# Altium PCB Tray2.PcbDoc (part 4 of 6)
Units mil, origin at the board's own origin, x right, y up, seen from the top; angles counter-clockwise.
Board outline 6000 x 4000 mil, 2 copper layers (Top Layer, Bottom Layer); 418 components, 415 nets, 1799 pads, 870 vias.
Unrouted connection lines stored in the file: 363.
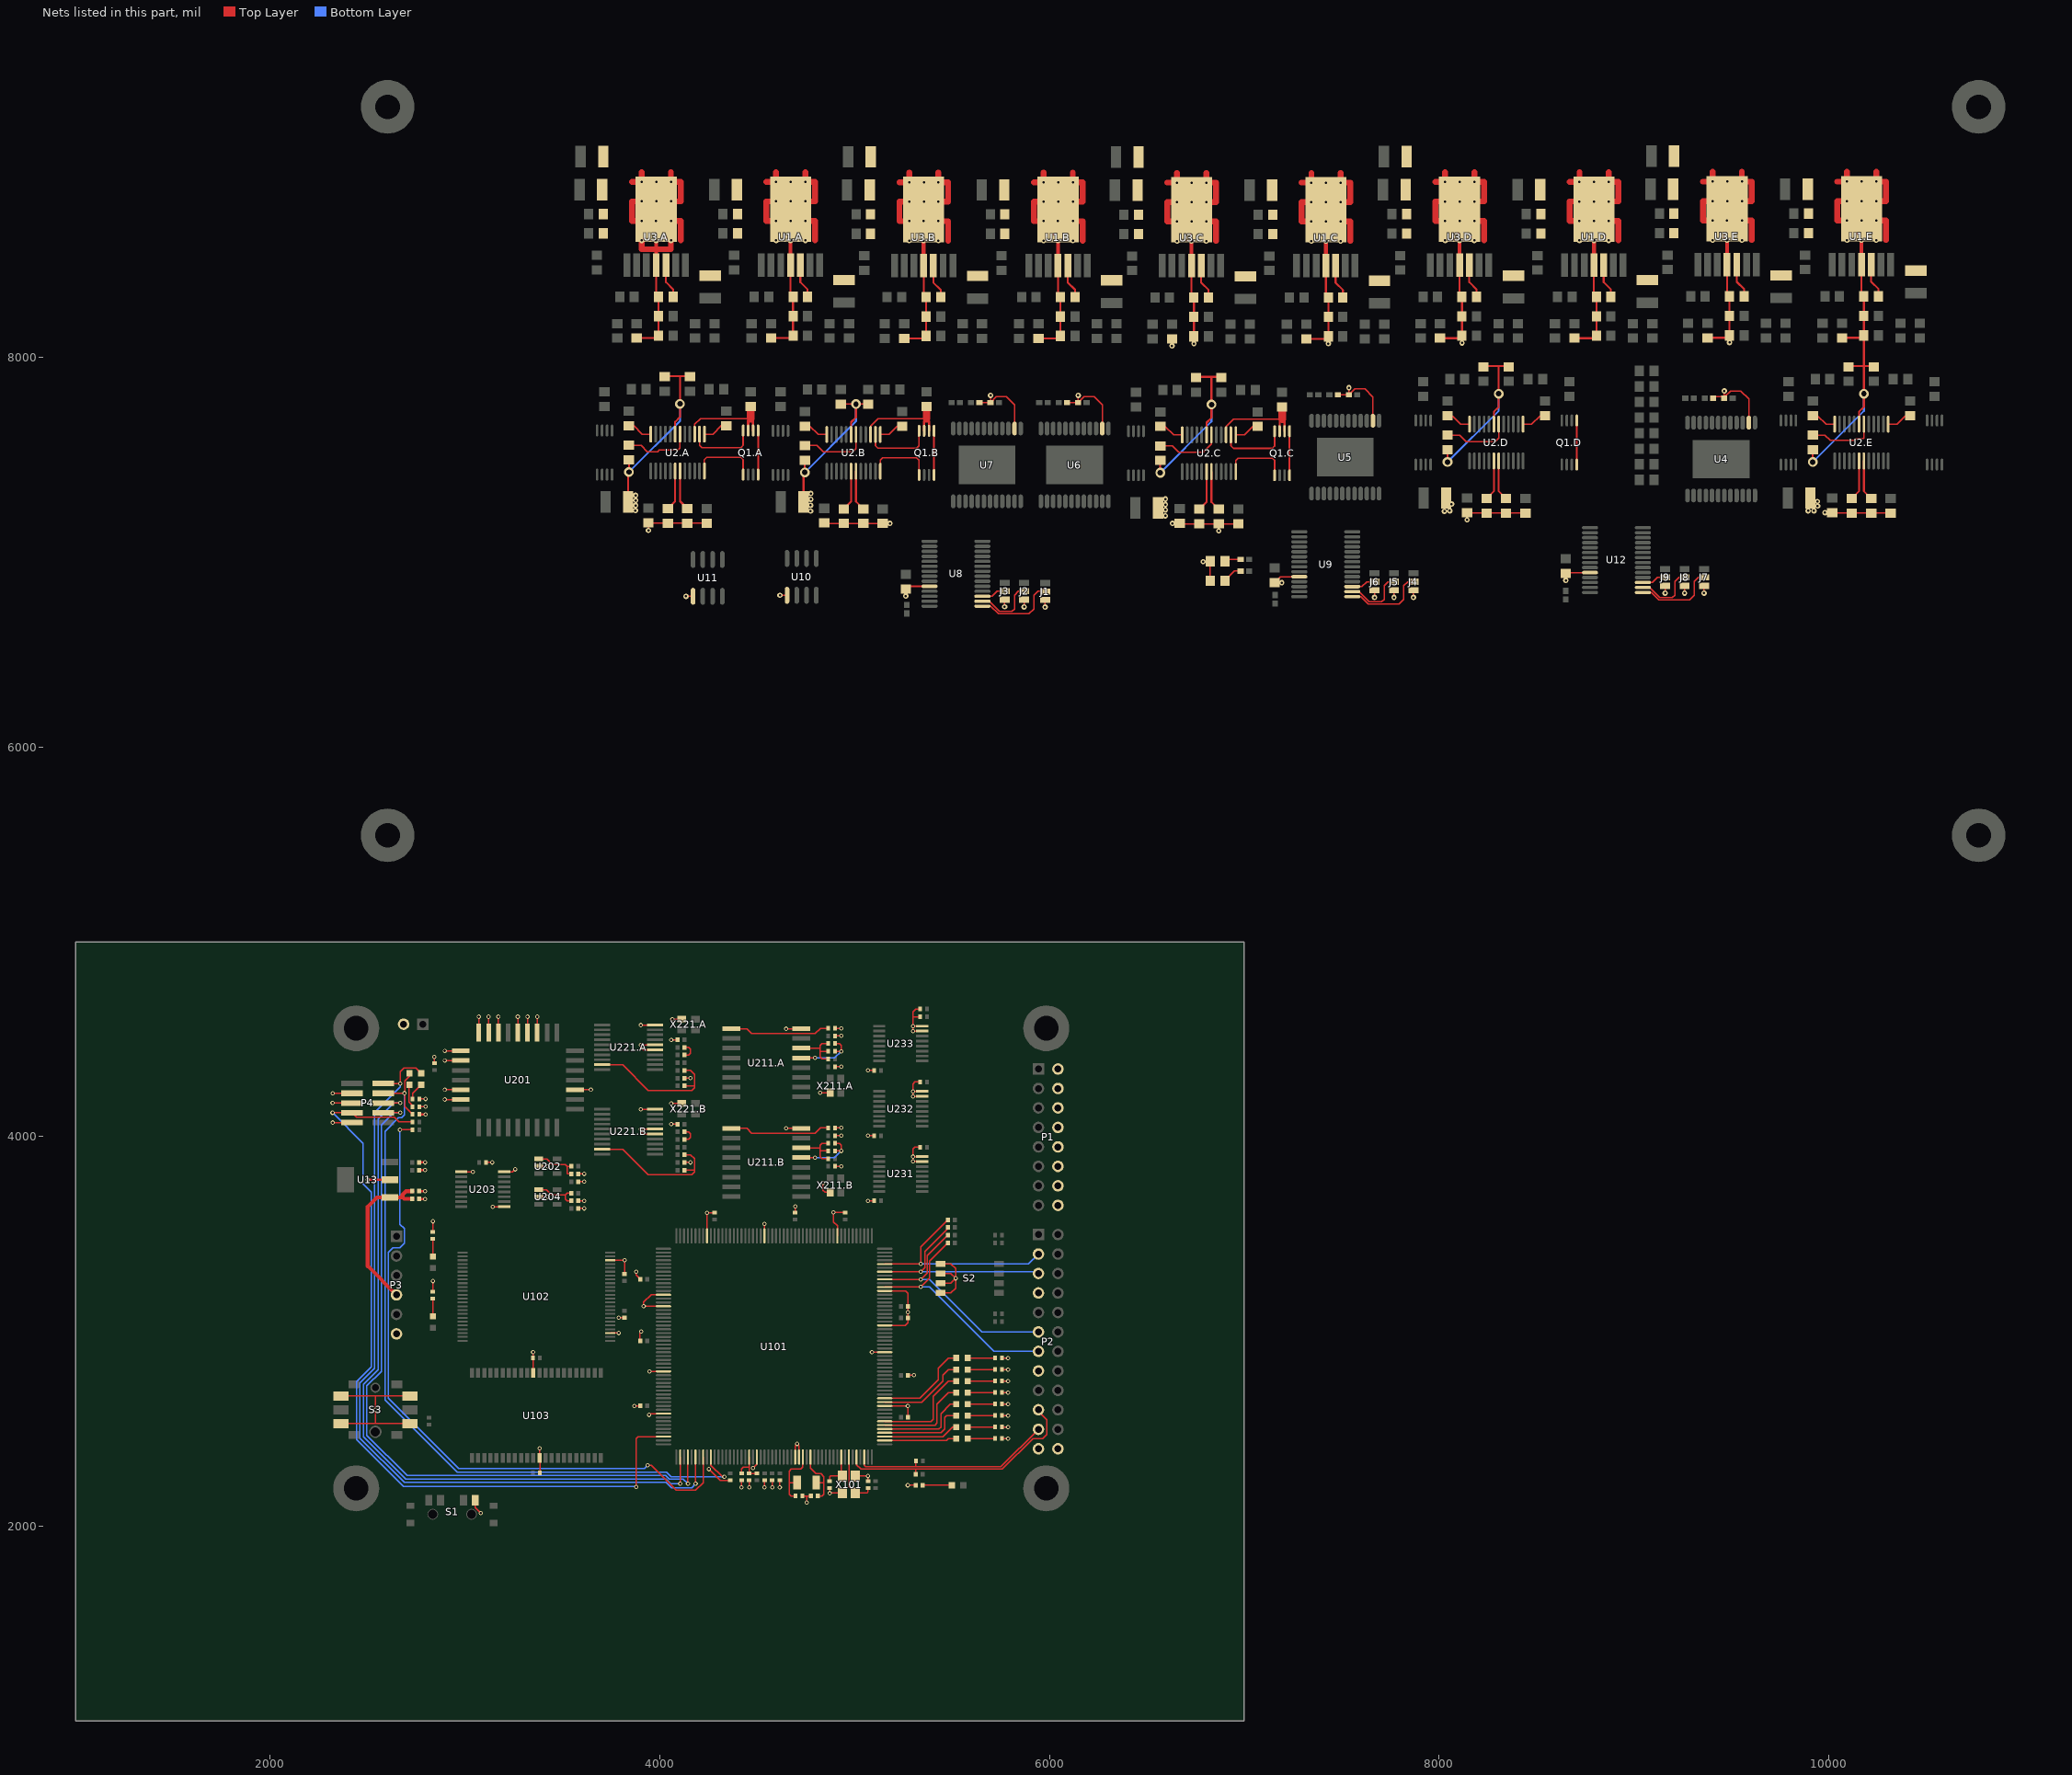
[diagram p4: the nets of this part, all layers, seen from the top]

## Via types
v1: diameter 21.65, hole 11.81, Top Layer to Bottom Layer, tented both sides, 370 vias
v2: diameter 27.56, hole 11.81, Top Layer to Bottom Layer, tented both sides, 231 vias
v3: diameter 27.56, hole 11.81, Top Layer to Bottom Layer, tented bottom, 120 vias
v4: diameter 25.98, hole 12.99, Top Layer to Bottom Layer, tented both sides, 96 vias
v5: diameter 50, hole 28, Top Layer to Bottom Layer, tented both sides, 40 vias
v6: diameter 21.65, hole 13.78, Top Layer to Bottom Layer, 13 vias

## Nets (pads, with @x,y where several pads share a name; then routed paths per layer and width w, separated by ;. In a path a pad name is that pad's centre, name@x,y a point inside that pad or via, vN(x,y) a via of type N, cw(c..) or ccw(c..) an arc to the next point about the centre after c; other vN are vias at no path point) (continued)
GND: C1.A.1 C1.B.1 C1.C.1 C1.D.1 C1.E.1 C3.A.2 C3.B.2 C3.C.2 C3.D.2 C3.E.2 C4.A.1 C4.B.1 C4.C.1 C4.D.1 C4.E.1 C6.A.1 C6.B.1 C6.C.1 C6.D.1 C6.E.1 C7.A.1 C7.B.1 C7.C.1 C7.D.1 C7.E.1 C8.A.1 C8.B.1 C8.C.1 C8.D.1 C8.E.1 C9.A.2 C9.B.2 C9.C.2 C9.D.2 C9.E.2 C10.A.2 C10.B.2 C10.C.2 C10.D.2 C10.E.2 C11.A.1 C11.B.1 C11.C.1 C11.D.1 C11.E.1 C13.A.2 C13.B.2 C13.C.2 C13.D.2 C13.E.2 C15.A.1 C15.B.1 C15.C.1 C15.D.1 C15.E.1 C16.A.1 C16.B.1 C16.C.1 C16.D.1 C16.E.1 C17.A.2 C17.B.2 C17.C.2 C17.D.2 C17.E.2 C18.A.2 C18.B.2 C18.C.2 C18.D.2 C18.E.2 C19.A.1 C19.B.1 C19.C.1 C19.D.1 C19.E.1 C20.2 C21.2 C22.2 C23.1 C24.1 C25.1 C26.1 C101.1 C102.1 C103.1 C104.1 C105.1 C106.1 C107.1 C108.1 C109.1 C110.1 C111.1 C112.1 C113.1 C114.1 C115.1 C116.1 C117.1 C118.1 C119.1 C120.2 C121.1 C122.2 C123.1 C201.2 C202.2 C203.2 C204.1 C205.1 C206.1 C211.A.1 C211.B.1 C212.A.1 C212.B.1 C214.A.1 C214.B.1 C222.A.1 C222.B.1 C224.A.2 C224.B.2 C231.1 C232.1 C233.1 D100.2 D101.2 J1.3 J2.3 J3.3 J4.3 J5.3 J6.3 J7.3 J8.3 J9.3 P1.2 P1.4 P1.6 P1.8 P1.10 P1.12 P1.14 P1.16 P2.7 P2.15 P2.23 P2.24 P3.6 P4.3 P4.5 P4.9 P5.2 R3.A.1 R3.B.1 R3.C.1 R3.D.1 R3.E.1 R7.2 R7.A.1 R7.B.1 R7.C.1 R7.D.1 R7.E.1 R8.2 R8.A.1 R8.B.1 R8.C.1 R8.D.1 R8.E.1 R9.2 R9.A.2 R9.B.2 R9.C.2 R9.D.2 R9.E.2 R10.2 R10.A.1 R10.B.1 R10.C.1 R10.D.1 R10.E.1 R16.A.1 R16.B.1 R16.C.1 R16.D.1 R16.E.1 R17.A.1 R17.B.1 R17.C.1 R17.D.1 R17.E.1 R18.A.2 R18.B.2 R18.C.2 R18.D.2 R18.E.2 R21.2 R22.2 R23.2 R24.2 R27.2 R28.2 R29.2 R30.2 R44.A.2 R44.B.2 R44.C.2 R44.D.2 R44.E.2 R45.A.2 R45.B.2 R45.C.2 R45.D.2 R45.E.2 R52.2 R53.2 R54.2 R55.2 R56.2 R57.2 R58.2 R59.2 R60.2 R101.2 R104.2 R231.2 R232.2 R233.2 R234.1 S1.4 S2.1 S2.2 S2.3 S2.4 S3.1 S3.3 S3.4 S3.6 U1.A.4 U1.B.4 U1.C.4 U1.D.4 U1.E.4 U2.A.7 U2.B.7 U2.C.7 U2.D.7 U2.E.7 U3.A.4 U3.B.4 U3.C.4 U3.D.4 U3.E.4 U4.GND U5.GND U6.GND U7.GND U8.10 U9.10 U10.5 U11.5 U12.10 U13.2 U101.22 U101.32 U101.33 U101.63 U101.77 U101.84 U101.93 U101.114 U101.133 U101.148 U101.169 U101.172 U101.189 U101.200 U102.27 U102.46 U103.12 U103.34 U201.2 U201.3 U201.16 U201.23 U201.24 U201.25 U201.27 U201.28 U201.29 U201.30 U201.31 U202.2 U203.1 U203.8 U203.9 U204.2 U211.A.8 U211.B.8 U221.A.5 U221.A.6 U221.A.10 U221.B.5 U221.B.6 U221.B.10 U231.7 U231.8 U232.7 U232.8 U233.7 U233.8 X101.3 X211.A.2 X211.B.2 X221.A.2 X221.B.2 | length 42684.2
  Top Layer w5.91: v1@2319.17,4072.17 v1(2319.37,4072.36) P4.9@2420.08,4072.36 ; v1(2319.17,4172.17) 2319.37,4172.36 P4.5@2420.08,4172.36 ; v1(2319.37,4222.36) P4.3@2420.08,4222.36 ; S3.1@2362.28,2526.69 2539.45,2526.69 ; S3.3@2362.28,2668.43 2539.45,2668.43 ; S3.4@2716.61,2526.69 2539.45,2526.69 ; S3.6@2716.61,2668.43 2539.45,2668.43 ; R10.2@2765.83,4153.66 v1(2797.32,4153.66) ; R8.2@2765.83,4193.03 v1(2797.32,4193.03) ; R7.2@2834.72,3203.86 v1(2834.72,3257.99) ; R9.2@2834.72,3510.95 v1(2834.72,3565.08) ; C201.2@2842.6,4377.09 v1(2842.6,4408.58) ; v6(2895.55,4190.47) U201.3@2977.05,4190.47 ; v6(2895.55,4240.47) U201.2@2977.05,4240.47 ; v6(2895.55,4390.47) U201.31@2977.05,4390.47 ; v6(2895.55,4440.47) U201.30@2977.05,4440.47 ; U203.9@2980.39,3819.02 v1(3039.45,3819.02) ; S1.4@3052.15,2121.17 3052.15,2094.7 v1(3080.79,2066.06) ; U201.29@3070.75,4534.17 v6(3070.75,4615.67) ; C203.2@3108.35,3867.24 v1(3139.84,3867.24) ; U201.28@3120.75,4534.17 v6(3120.75,4615.67) ; v1(3141.81,3639.88) U203.1@3200.87,3639.88 ; U201.27@3170.75,4534.17 v6(3170.75,4615.67) ; U203.8@3200.87,3819.02 3244.17,3819.02 v1(3256.97,3831.81) ; U201.25@3270.75,4534.17 v6(3270.75,4615.67) ; U201.24@3320.75,4534.17 v6(3320.75,4615.67) ; U103.12@3348.5,2788.5 C116.1@3348.5,2863.31 v1(3348.5,2892.83) ; U201.23@3370.75,4534.17 v6(3370.75,4615.67) ; U204.2@3378.03,3690.08 v1(3425.28,3690.08) ; U202.2@3378.03,3847.56 v1(3425.28,3847.56) ; U103.34@3381.97,2349.53 v1(3381.97,2400.71) ; C117.1@3383.94,2272.76 U103.34@3383.94,2347.56 ; U201.16@3564.45,4240.47 v6(3645.94,4240.47) ; C204.1@3580.79,3631.02 v1(3612.28,3631.02) ; C206.1@3580.79,3670.39 v1(3612.28,3670.39) ; C202.2@3580.79,3768.82 v1(3612.28,3768.82) ; C205.1@3580.79,3808.19 v1(3612.28,3808.19) ; U102.27@3745.16,2991.26 v1(3789.45,2991.26) ; U102.46@3745.16,3365.28 v1(3818.98,3365.28) 3818.98,3304.25 ; v1(3789.45,3070) C119.1@3818.98,3070 ; v1(3868.19,2617.24) C113.1@3899.68,2617.24 ; v1(3878.03,3306.22) 3878.03,3286.54 3880,3286.54 C111.1@3899.68,3266.85 ; v1@3897.72,2991.26 3897.72,2953.86 C112.1@3899.68,2951.89 ; v1(3902.64,4139.88) U221.B.10@3948.9,4139.88 ; v1(3902.64,4572.95) U221.A.10@3948.9,4572.95 ; v1(3904.61,2999.13) v1@3904.61,3007.01 ; v1(3944.96,2570.98) 3951.85,2577.87 U101.200@4018.78,2577.87 ; v1(3946.93,2794.41) U101.189@4018.78,2794.41 ; U221.B.5@3948.9,4011.93 3915.43,4011.93 3902.64,4024.72 v1(3902.64,4037.52) U221.B.6@3948.9,4037.52 ; U221.A.5@3948.9,4445 3915.43,4445 3902.64,4457.8 v1(3902.64,4470.59) U221.A.6@3948.9,4470.59 ; U101.172@4018.78,3129.06 v1(3917.4,3129.06) 3917.4,3149.72 3955.79,3188.11 U101.169@4018.78,3188.11 ; v1(4059.13,4064.09) C224.B.2@4090.63,4064.09 ; v1(4059.13,4170.39) X221.B.2@4112.28,4170.39 ; v1(4059.13,4497.17) C224.A.2@4090.63,4497.17 ; v1(4064.06,4603.46) X221.A.2@4112.28,4603.46 ; C222.B.1@4126.06,3867.24 v1(4157.56,3867.24) ; C222.A.1@4126.06,4300.32 v1(4157.56,4300.32) ; U101.148@4242.2,3490.28 v1(4242.2,3609.37) C110.1@4281.57,3609.37 ; v1(4252.05,2292.44) 4311.1,2233.39 4358.35,2233.39 C101.1@4360.31,2235.35 ; v1(4419.37,2198.94) C115.1@4419.37,2235.35 ; v1(4458.74,2198.94) C114.1@4458.74,2235.35 ; v1(4478.53,2297.38) 4498.11,2316.95 U101.22@4498.11,2354.45 ; v1(4537.48,2198.94) C102.1@4537.48,2235.35 ; U101.133@4537.48,3490.28 v1(4537.48,3552.28) ; v1(4576.85,2198.94) C103.1@4576.85,2235.35 ; v1(4616.22,2198.94) R101.2@4616.22,2233.39 ; v1(4647.32,4042.24) U211.B.8@4726.46,4042.24 ; v1(4647.32,4554.06) U211.A.8@4726.46,4554.06 ; U101.32@4694.96,2354.45 4694.96,2412.52 v1(4704.8,2422.36) 4714.65,2412.52 U101.33@4714.65,2354.45 U101.33@4714.65,2321.97 ; C109.1@4694.96,3609.37 v1(4694.96,3640.87) ; C122.2@4734.33,2154.65 C123.1@4775.67,2154.65 ; v1(4754.02,2120.2) 4754.02,2153.66 ; v1(4822.91,4225.51) X211.A.2@4874.09,4225.51 ; v1(4837.68,3762.91) 4837.68,3724.53 4848.5,3713.7 X211.B.2@4874.09,3713.7 ; C120.2@4872.13,2195.98 4872.13,2170.39 X101.3@4927.24,2170.39 ; v1@4891.81,3609.37 4891.81,3562.13 4911.5,3542.44 U101.114@4911.5,3490.28 ; v1(4891.81,3611.34) 4948.9,3611.34 C108.1@4950.87,3609.37 ; C212.B.1@4899.69,3847.56 v1(4931.18,3847.56) ; C211.B.1@4899.69,4005.04 v1(4931.18,4005.04) ; C214.B.1@4899.69,4044.41 v1(4931.18,4044.41) ; C212.A.1@4899.69,4359.37 v1(4931.18,4359.37) ; C211.A.1@4899.69,4516.85 v1(4931.18,4516.85) ; C214.A.1@4899.69,4556.22 v1(4931.18,4556.22) ; X101.3@4994.17,2257.01 X101.3@5004.02,2257.01 v1(5068.98,2257.01) C121.1@5068.98,2231.42 ; v1(5068.98,3670.39) C231.1@5100.47,3670.39 ; v1(5068.98,4005.04) C232.1@5100.47,4005.04 ; v1(5068.98,4339.69) C233.1@5100.47,4339.69 ; v1(5088.66,2892.83) U101.77@5154.61,2892.83 ; U101.63@5154.61,2617.24 v1(5272.72,2617.24) C104.1@5272.72,2559.17 ; U101.84@5154.61,3030.63 5259.92,3030.63 5273.7,3044.41 v1(5273.7,3099.53) C107.1@5273.7,3129.06 5273.7,3195.98 5261.89,3207.8 U101.93@5154.61,3207.8 ; v1(5272.72,2209.76) R60.2@5314.06,2209.76 ; C105.1@5273.7,2774.72 v1(5305.2,2774.72) ; R231.2@5336.69,3945.98 5310.12,3945.98 5300.28,3936.14 v1(5300.28,3897.76) ; R232.2@5336.69,4280.63 5310.12,4280.63 5300.28,4270.79 v1(5300.28,4232.4) ; R233.2@5336.69,4615.28 5300.28,4615.28 ; R234.1@5336.69,4654.65 5315.04,4654.65 5300.28,4639.88 5300.28,4615.28 ; U231.7@5346.54,3872.17 v1(5300.28,3872.17) v1(5300.28,3897.76) ; U231.8@5346.54,3897.76 v1(5300.28,3897.76) ; U232.7@5346.54,4206.81 v1(5300.28,4206.81) v1(5300.28,4232.4) ; U232.8@5346.54,4232.4 v1(5300.28,4232.4) ; U233.7@5346.54,4541.46 v1(5300.28,4541.46) v1(5300.28,4567.05) ; U233.8@5346.54,4567.05 v1(5300.28,4567.05) ; S2.4@5440.63,3197.17 5494.17,3197.17 5519.17,3222.17 v1(5519.17,3272.17) ; S2.3@5440.63,3247.17 5494.17,3247.17 v1(5519.17,3272.17) ; S2.2@5440.63,3297.17 5494.17,3297.17 v1(5519.17,3272.17) ; S2.1@5440.63,3347.17 5494.17,3347.17 5519.17,3322.17 v1(5519.17,3272.17) ; R59.2@5755.98,2449.92 v1(5787.48,2449.92) ; R58.2@5755.98,2508.98 v1(5787.48,2508.98) ; R57.2@5755.98,2568.03 v1(5787.48,2568.03) ; R56.2@5755.98,2627.09 v1(5787.48,2627.09) ; R55.2@5755.98,2686.14 v1(5787.48,2686.14) ; R54.2@5755.98,2745.2 v1(5787.48,2745.2) ; R53.2@5755.98,2804.25 v1(5787.48,2804.25) ; R52.2@5755.98,2863.31 v1(5787.48,2863.31) ; 2539.45,2526.69 v1(2539.45,2597.56) 2539.45,2668.43 ; v1(5300.28,4567.05) 5300.28,4615.28
  Top Layer w6: C1.A.1@3837.01,7214.69 v2(3874.39,7214.69) ; C1.A.1@3838.01,7240.69 v2(3875.39,7240.69) ; C1.A.1@3838.01,7292.69 v2(3875.39,7292.69) ; C1.A.1@3839.01,7266.69 v2(3876.39,7266.69) ; v2(3941.18,7112.34) 3941.18,7149.73 R44.A.2@4241.18,7149.72 ; v2(4134.06,6774.21) U11.5@4170.71,6774.21 ; v2(4616.54,6779.37) U10.5@4653.19,6779.37 ; C1.B.1@4737.01,7211.69 v2(4774.39,7211.69) ; C1.B.1@4737.01,7241.69 v2(4774.39,7241.69) ; C1.B.1@4737.76,7271.69 v2(4775.14,7271.69) ; C1.B.1@4737.76,7301.69 v2(4775.14,7301.69) ; R45.B.2@4844.53,7148.23 R44.B.2@5144.53,7148.23 v2(5181.18,7148.23) ; R10.B.1@4929.53,7761.3 R3.B.1@5069.69,7761.3 ; v2(5262.91,6775.59) C20.2@5262.91,6812.24 ; R29.2@5641.34,7768.7 R30.2@5698.03,7768.7 ; v2(5698.03,7805.35) R30.2@5698.03,7768.7 ; v2@5770.63,6711.99 J3.3@5770.63,6757.03 ; U7.GND@5821.42,7635.71 5821.42,7756.97 5779.69,7798.7 5728.03,7798.7 R30.2@5698.03,7768.7 ; v2@5870.63,6711.65 J2.3@5870.63,6756.68 ; v2@5978.5,6710.07 J1.3@5978.5,6755.11 ; R27.2@6091.34,7768.7 R28.2@6148.03,7768.7 ; v2(6148.03,7805.35) R28.2@6148.03,7768.7 ; U6.GND@6271.42,7635.71 6271.42,7756.97 6229.69,7798.7 6178.03,7798.7 R28.2@6148.03,7768.7 ; C1.C.1@6558.01,7186.69 v2(6595.39,7186.69) ; C1.C.1@6559.01,7217.69 v2(6596.39,7217.69) ; C1.C.1@6559.01,7245.69 v2(6596.39,7245.69) ; C1.C.1@6559.01,7273.69 v2(6596.39,7273.69) ; v2(6629.76,8059.65) R18.C.2@6629.76,8096.3 ; v2(6632.38,7148.9) R45.C.2@6669.76,7148.9 ; R45.C.2@6669.76,7146.3 R44.C.2@6969.76,7146.3 ; v2(6742.36,8072.05) R16.C.1@6742.36,8108.7 ; v2(6789.33,6951.69) D101.2@6825.98,6951.69 ; D100.2@6825.98,6853.74 D101.2@6825.98,6953.74 ; v2(6869.76,7109.65) C4.C.1@6869.76,7146.3 ; v2(7193.66,6844.29) C21.2@7157.01,6844.29 7187.44,6874.72 U9.10@7283.62,6874.72 ; v2(7432.36,8072.05) R8.C.1@7432.36,8108.7 ; R23.2@7481.34,7808.7 R24.2@7538.03,7808.7 ; v2(7538.03,7845.35) R24.2@7538.03,7808.7 ; U5.GND@7661.42,7675.71 7661.42,7796.97 7619.69,7838.7 7568.03,7838.7 R24.2@7538.03,7808.7 ; v2@7669.45,6760.7 v2(7669.45,6768.7) J6.3@7669.45,6805.74 ; v2@7769.45,6760.7 v2(7769.45,6768.7) J5.3@7769.45,6805.74 ; v2@7869.45,6760.7 v2(7869.45,6768.7) J4.3@7869.45,6805.74 ; v2(8028.01,7210.31) 8028.01,7247.69 v2(8065.39,7247.69) ; v2(8056.01,7213.31) C1.D.1@8056.01,7250.69 ; v2(8118.74,8075.12) R16.D.1@8118.74,8111.77 ; v2(8144.68,7166.51) R45.D.2@8144.68,7203.9 ; R45.D.2@8144.68,7201.3 R44.D.2@8444.68,7201.3 ; v2(8651.82,6856.07) C22.2@8651.82,6892.72 8655.24,6896.14 U12.10@8775.99,6896.14 ; v2(9161.82,6790.12) J9.3@9161.82,6827.51 ; v2(9261.82,6790.12) J8.3@9261.82,6827.51 ; v2(9361.82,6790.12) J7.3@9361.82,6827.51 ; R21.2@9411.34,7798.7 9468.03,7798.7 9498.03,7828.7 9549.69,7828.7 9591.42,7786.97 U4.GND@9591.42,7665.71 ; R22.2@9465.35,7791.69 v2(9465.35,7828.35) ; v2(9492.36,8077.05) R16.E.1@9492.36,8113.7 ; v2(9896.01,7213.31) C1.E.1@9896.01,7250.69 ; C1.E.1@9906.01,7260.69 v2(9943.39,7260.69) ; C1.E.1@9907.01,7237.69 v2(9944.39,7237.69) ; v2(9926.01,7213.31) C1.E.1@9926.01,7250.69 ; v2(9982.38,7203.9) R45.E.2@10019.76,7203.9 ; R45.E.2@10019.76,7201.3 R44.E.2@10319.76,7201.3
  Top Layer w10: C1.A.1@3837.76,7258.7 3837.76,7408.7 v5(3841.18,7412.13) C3.A.2@3841.18,7474.73 ; R18.A.2@3881.18,8099.73 R16.A.1@3981.38,8099.73 ; U3.A.4@3981.18,8474.53 3981.18,8324.72 C18.A.2@3993.78,8312.13 R17.A.1@3993.78,8212.13 R16.A.1@3993.78,8112.13 ; R10.A.1@4026.18,7904.53 4103.78,7904.53 ; U2.A.7@4078.78,7606.71 U2.A.7@4078.68,7606.61 4078.68,7669.63 4103.78,7694.72 v5(4103.78,7762.13) 4103.78,7904.53 ; R3.A.1@4156.18,7904.53 4103.78,7904.53 ; R9.A.2@4571.18,8099.73 R8.A.1@4671.38,8099.73 ; U1.A.4@4671.18,8474.53 4671.18,8324.72 C10.A.2@4683.78,8312.13 R8.A.1@4683.78,8112.13 ; C1.B.1@4737.76,7258.7 4737.76,7403.86 v5(4744.53,7410.63) C3.B.2@4744.53,7473.23 ; U2.B.7@4982.13,7605.22 U2.B.7@4982.03,7605.12 4982.03,7668.13 5007.13,7693.23 v5(5007.13,7760.63) ; R18.B.2@5254.53,8098.23 R16.B.1@5354.73,8098.23 ; C20.2@5262.91,6812.24 5276.34,6825.67 U8.10@5384.8,6825.67 ; U3.B.4@5354.53,8473.03 5354.53,8323.23 C18.B.2@5367.13,8310.63 R16.B.1@5367.13,8110.63 ; R9.B.2@5944.53,8098.23 R8.B.1@6044.73,8098.23 ; U1.B.4@6044.53,8473.03 6044.53,8323.23 C10.B.2@6057.13,8310.63 R8.B.1@6057.13,8110.63 ; v5(6569.76,7408.7) C3.C.2@6569.76,7471.3 ; U3.C.4@6729.76,8471.1 6729.77,8321.3 C18.C.2@6742.36,8308.7 R16.C.1@6742.36,8108.7 ; R10.C.1@6754.76,7901.1 6832.36,7901.1 ; U2.C.7@6807.36,7603.29 U2.C.7@6807.27,7603.19 6807.26,7666.2 6832.36,7691.3 v5(6832.36,7758.7) 6832.36,7901.1 ; R3.C.1@6884.76,7901.1 6832.36,7901.1 ; R9.C.2@7319.76,8096.3 R8.C.1@7419.96,8096.3 ; U1.C.4@7419.76,8471.1 7419.77,8321.3 C10.C.2@7432.36,8308.7 R8.C.1@7432.36,8108.7 ; R18.D.2@8006.14,8099.37 R16.D.1@8106.34,8099.37 ; v5(8044.68,7463.7) C3.D.2@8044.68,7526.3 ; U3.D.4@8106.14,8474.17 8106.14,8324.37 C18.D.2@8118.74,8311.77 R16.D.1@8118.74,8111.77 ; R10.D.1@8229.68,7956.1 8307.28,7956.1 ; U2.D.7@8282.28,7658.29 U2.D.7@8282.18,7658.19 8282.18,7721.2 8307.28,7746.3 v5(8307.28,7813.7) 8307.28,7956.1 ; R3.D.1@8359.68,7956.1 8307.28,7956.1 ; R9.D.2@8696.14,8099.37 R8.D.1@8796.34,8099.37 ; U1.D.4@8796.14,8474.17 8796.14,8324.37 C10.D.2@8808.74,8311.77 R8.D.1@8808.74,8111.77 ; R18.E.2@9379.76,8101.3 R16.E.1@9479.96,8101.3 ; U3.E.4@9479.76,8476.1 9479.77,8326.3 C18.E.2@9492.36,8313.7 R16.E.1@9492.36,8113.7 ; v5(9919.76,7463.7) C3.E.2@9919.76,7526.3 ; R9.E.2@10069.76,8101.3 R8.E.1@10169.96,8101.3 ; R10.E.1@10104.76,7956.1 10182.36,7956.1 ; U2.E.7@10157.36,7658.29 U2.E.7@10157.27,7658.19 10157.26,7721.2 10182.36,7746.3 v5(10182.36,7813.7) 10182.36,7956.1 ; U1.E.4@10169.76,8476.1 10169.77,8326.3 C10.E.2@10182.36,8313.7 R8.E.1@10182.36,8113.7 10182.36,7956.1 ; R3.E.1@10234.76,7956.1 10182.36,7956.1
  Top Layer w11.81: v1(2500.08,3778.66) U13.2@2614.25,3778.66 ; C26.1@2763.86,3680.24 v1(2795.35,3680.24) ; C25.1@2763.86,3719.61 v1(2795.35,3719.61) ; C24.1@2763.86,3827.87 v1(2795.35,3827.87) ; C23.1@2763.86,3867.24 v1(2795.35,3867.24) ; R104.2@2765.91,4113.88 v1(2797.4,4113.88)
  Top Layer w20: U3.A.4@3981.18,8474.53 3981.18,8555.76 v3(3981.18,8701.69) U3.A.4@3981.18,8762.13 ; U1.A.4@4671.18,8474.53 U1.A.4@4671.18,8762.13 v3(4671.18,8701.69) ; U3.B.4@5354.53,8473.03 U3.B.4@5354.53,8760.63 v3(5354.53,8700.2) ; U1.B.4@6044.53,8473.03 U1.B.4@6044.53,8760.63 v3(6044.53,8700.2) ; U3.C.4@6729.76,8471.1 U3.C.4@6729.76,8758.7 v3(6729.77,8698.27) ; U1.C.4@7419.76,8471.1 U1.C.4@7419.76,8758.7 v3(7419.77,8698.27) ; U3.D.4@8106.14,8474.17 U3.D.4@8106.14,8761.77 v3(8106.14,8701.34) ; U1.D.4@8796.14,8474.17 U1.D.4@8796.14,8761.77 v3(8796.14,8701.34) ; U3.E.4@9479.76,8476.1 U3.E.4@9479.76,8763.7 v3(9479.77,8703.27) ; U1.E.4@10169.76,8476.1 U1.E.4@10169.76,8763.7 v3(10169.77,8703.27)
  Top Layer w30: 3857.01,8901.69 v3(3907.01,8901.69) ; 3907.01,8951.69 v3(3907.01,8901.69) ; 4057.01,8951.69 v3(4057.01,8901.69) ; 4107.01,8601.69 4107.01,8701.69 v3(4057.01,8701.69) ; 4547.01,8901.69 v3(4597.01,8901.69) ; 4597.01,8951.69 v3(4597.01,8901.69) ; 4747.01,8951.69 v3(4747.01,8901.69) ; 4797.01,8601.69 4797.01,8701.69 v3(4747.01,8701.69) ; 5230.36,8900.2 v3(5280.36,8900.2) ; 5280.36,8950.2 v3(5280.36,8900.2) ; 5430.36,8950.2 v3(5430.36,8900.2) ; 5480.36,8600.2 5480.36,8700.2 v3(5430.36,8700.2) ; 5920.36,8900.2 v3(5970.36,8900.2) ; 5970.36,8950.2 v3(5970.36,8900.2) ; 6120.36,8950.2 v3(6120.36,8900.2) ; 6170.36,8600.2 6170.36,8700.2 v3(6120.36,8700.2) ; 6605.59,8898.27 v3(6655.59,8898.27) ; 6655.59,8948.27 v3(6655.59,8898.27) ; 6805.59,8948.27 v3(6805.59,8898.27) ; 6855.59,8598.27 6855.59,8698.27 v3(6805.59,8698.27) ; 7295.59,8898.27 v3(7345.59,8898.27) ; 7345.59,8948.27 v3(7345.59,8898.27) ; 7495.59,8948.27 v3(7495.59,8898.27) ; 7545.59,8598.27 7545.59,8698.27 v3(7495.59,8698.27) ; 7981.97,8901.34 v3(8031.97,8901.34) ; 8031.97,8951.34 v3(8031.97,8901.34) ; 8181.97,8951.34 v3(8181.97,8901.34) ; 8231.97,8601.34 8231.97,8701.34 v3(8181.97,8701.34) ; 8671.97,8901.34 v3(8721.97,8901.34) ; 8721.97,8951.34 v3(8721.97,8901.34) ; 8871.97,8951.34 v3(8871.97,8901.34) ; 8921.97,8601.34 8921.97,8701.34 v3(8871.97,8701.34) ; 9355.59,8903.27 v3(9405.59,8903.27) ; 9405.59,8953.27 v3(9405.59,8903.27) ; 9555.59,8953.27 v3(9555.59,8903.27) ; 9605.59,8603.27 9605.59,8703.27 v3(9555.59,8703.27) ; 10045.59,8903.27 v3(10095.59,8903.27) ; 10095.59,8953.27 v3(10095.59,8903.27) ; 10245.59,8953.27 v3(10245.59,8903.27) ; 10295.59,8603.27 10295.59,8703.27 v3(10245.59,8703.27) ; v3(3907.01,8701.69) 3907.01,8555.76 3981.18,8555.76 4057.01,8555.76 v3(4057.01,8701.69) ; v3(3907.01,8701.69) v3(3907.01,8801.69) ; v3(3907.01,8701.69) 3857.01,8701.69 3857.01,8801.69 v3(3907.01,8801.69) ; v3(3907.01,8701.69) v3(3981.18,8701.69) v3(4057.01,8701.69) ; v3(3907.01,8801.69) v3(3907.01,8901.69) ; v3(3907.01,8801.69) v3(4057.01,8801.69) ; v3(3907.01,8901.69) v3(4057.01,8901.69) ; v3(4057.01,8701.69) v3(4057.01,8801.69) ; v3(4057.01,8801.69) v3(4057.01,8901.69) ; v3(4057.01,8801.69) 4107.01,8801.69 4107.01,8901.69 v3(4057.01,8901.69) ; v3(4597.01,8701.69) v3(4671.18,8701.69) v3(4747.01,8701.69) ; v3(4597.01,8701.69) 4547.01,8701.69 4547.01,8801.69 v3(4597.01,8801.69) ; v3(4597.01,8701.69) v3(4597.01,8801.69) ; v3(4597.01,8801.69) v3(4747.01,8801.69) ; v3(4597.01,8801.69) v3(4597.01,8901.69) ; v3(4597.01,8901.69) v3(4747.01,8901.69) ; v3(4747.01,8701.69) v3(4747.01,8801.69) ; v3(4747.01,8801.69) 4797.01,8801.69 4797.01,8901.69 v3(4747.01,8901.69) ; v3(4747.01,8801.69) v3(4747.01,8901.69) ; v3(5280.36,8700.2) v3(5354.53,8700.2) v3(5430.36,8700.2) ; v3(5280.36,8700.2) 5230.36,8700.2 5230.36,8800.2 v3(5280.36,8800.2) ; v3(5280.36,8700.2) v3(5280.36,8800.2) ; v3(5280.36,8800.2) v3(5430.36,8800.2) ; v3(5280.36,8800.2) v3(5280.36,8900.2) ; v3(5280.36,8900.2) v3(5430.36,8900.2) ; v3(5430.36,8700.2) v3(5430.36,8800.2) ; v3(5430.36,8800.2) 5480.36,8800.2 5480.36,8900.2 v3(5430.36,8900.2) ; v3(5430.36,8800.2) v3(5430.36,8900.2) ; v3(5970.36,8700.2) v3(6044.53,8700.2) v3(6120.36,8700.2) ; v3(5970.36,8700.2) 5920.36,8700.2 5920.36,8800.2 v3(5970.36,8800.2) ; v3(5970.36,8700.2) v3(5970.36,8800.2) ; v3(5970.36,8800.2) v3(6120.36,8800.2) ; v3(5970.36,8800.2) v3(5970.36,8900.2) ; v3(5970.36,8900.2) v3(6120.36,8900.2) ; v3(6120.36,8700.2) v3(6120.36,8800.2) ; v3(6120.36,8800.2) 6170.36,8800.2 6170.36,8900.2 v3(6120.36,8900.2) ; v3(6120.36,8800.2) v3(6120.36,8900.2) ; v3(6655.59,8698.27) v3(6729.77,8698.27) v3(6805.59,8698.27) ; v3(6655.59,8698.27) 6605.59,8698.27 6605.59,8798.27 v3(6655.59,8798.27) ; v3(6655.59,8698.27) v3(6655.59,8798.27) ; v3(6655.59,8798.27) v3(6805.59,8798.27) ; v3(6655.59,8798.27) v3(6655.59,8898.27) ; v3(6655.59,8898.27) v3(6805.59,8898.27) ; v3(6805.59,8698.27) v3(6805.59,8798.27) ; v3(6805.59,8798.27) 6855.59,8798.27 6855.59,8898.27 v3(6805.59,8898.27) ; v3(6805.59,8798.27) v3(6805.59,8898.27) ; v3(7345.59,8698.27) v3(7419.77,8698.27) v3(7495.59,8698.27) ; v3(7345.59,8698.27) 7295.59,8698.27 7295.59,8798.27 v3(7345.59,8798.27) ; v3(7345.59,8698.27) v3(7345.59,8798.27) ; v3(7345.59,8798.27) v3(7495.59,8798.27) ; v3(7345.59,8798.27) v3(7345.59,8898.27) ; v3(7345.59,8898.27) v3(7495.59,8898.27) ; v3(7495.59,8698.27) v3(7495.59,8798.27) ; v3(7495.59,8798.27) 7545.59,8798.27 7545.59,8898.27 v3(7495.59,8898.27) ; v3(7495.59,8798.27) v3(7495.59,8898.27) ; v3(8031.97,8701.34) v3(8106.14,8701.34) v3(8181.97,8701.34) ; v3(8031.97,8701.34) 7981.97,8701.34 7981.97,8801.34 v3(8031.97,8801.34) ; v3(8031.97,8701.34) v3(8031.97,8801.34) ; v3(8031.97,8801.34) v3(8181.97,8801.34) ; v3(8031.97,8801.34) v3(8031.97,8901.34) ; v3(8031.97,8901.34) v3(8181.97,8901.34) ; v3(8181.97,8701.34) v3(8181.97,8801.34) ; v3(8181.97,8801.34) 8231.97,8801.34 8231.97,8901.34 v3(8181.97,8901.34) ; v3(8181.97,8801.34) v3(8181.97,8901.34) ; v3(8721.97,8701.34) v3(8796.14,8701.34) v3(8871.97,8701.34) ; v3(8721.97,8701.34) 8671.97,8701.34 8671.97,8801.34 v3(8721.97,8801.34) ; v3(8721.97,8701.34) v3(8721.97,8801.34) ; v3(8721.97,8801.34) v3(8871.97,8801.34) ; v3(8721.97,8801.34) v3(8721.97,8901.34) ; v3(8721.97,8901.34) v3(8871.97,8901.34) ; v3(8871.97,8701.34) v3(8871.97,8801.34) ; v3(8871.97,8801.34) 8921.97,8801.34 8921.97,8901.34 v3(8871.97,8901.34) ; v3(8871.97,8801.34) v3(8871.97,8901.34) ; v3(9405.59,8703.27) v3(9479.77,8703.27) v3(9555.59,8703.27) ; v3(9405.59,8703.27) 9355.59,8703.27 9355.59,8803.27 v3(9405.59,8803.27) ; v3(9405.59,8703.27) v3(9405.59,8803.27) ; v3(9405.59,8803.27) v3(9555.59,8803.27) ; v3(9405.59,8803.27) v3(9405.59,8903.27) ; v3(9405.59,8903.27) v3(9555.59,8903.27) ; v3(9555.59,8703.27) v3(9555.59,8803.27) ; v3(9555.59,8803.27) 9605.59,8803.27 9605.59,8903.27 v3(9555.59,8903.27) ; v3(9555.59,8803.27) v3(9555.59,8903.27) ; v3(10095.59,8703.27) v3(10169.77,8703.27) v3(10245.59,8703.27) ; v3(10095.59,8703.27) 10045.59,8703.27 10045.59,8803.27 v3(10095.59,8803.27) ; v3(10095.59,8703.27) v3(10095.59,8803.27) ; v3(10095.59,8803.27) v3(10245.59,8803.27) ; v3(10095.59,8803.27) v3(10095.59,8903.27) ; v3(10095.59,8903.27) v3(10245.59,8903.27) ; v3(10245.59,8703.27) v3(10245.59,8803.27) ; v3(10245.59,8803.27) 10295.59,8803.27 10295.59,8903.27 v3(10245.59,8903.27) ; v3(10245.59,8803.27) v3(10245.59,8903.27)
  Bottom Layer w10: v5(3841.18,7412.13) 4103.78,7674.72 v5(4103.78,7762.13) ; v5(4744.53,7410.63) 5007.13,7673.23 v5(5007.13,7760.63) ; v5(6569.76,7408.7) 6832.36,7671.3 v5(6832.36,7758.7) ; v5(8044.68,7463.7) 8307.28,7726.3 v5(8307.28,7813.7) ; v5(9919.76,7463.7) 10182.36,7726.3 v5(10182.36,7813.7)
  other v1: 4872.13,2169.41
  other v2: 5978.5,6718.42 5770.63,6720.34 5870.63,6719.99
  other v3: 6655.59,8598.27 6729.77,8598.27 6805.59,8598.27 7345.59,8598.27 7419.77,8598.27 7495.59,8598.27 5280.36,8600.2 5354.53,8600.2 5430.36,8600.2 5970.36,8600.2 6044.53,8600.2 6120.36,8600.2 8031.97,8601.34 8106.14,8601.34 8181.97,8601.34 8721.97,8601.34 8796.14,8601.34 8871.97,8601.34 3907.01,8601.69 3981.18,8601.69 4057.01,8601.69 4597.01,8601.69 4671.18,8601.69 4747.01,8601.69 9405.59,8603.27 9479.77,8603.27 9555.59,8603.27 10095.59,8603.27 10169.77,8603.27 10245.59,8603.27 6730.59,8798.27 7420.59,8798.27 5355.36,8800.2 6045.36,8800.2 8106.97,8801.34 8796.97,8801.34 3982.01,8801.69 4672.01,8801.69 9480.59,8803.27 10170.59,8803.27 6730.59,8898.27 7420.59,8898.27 5355.36,8900.2 6045.36,8900.2 8106.97,8901.34 8796.97,8901.34 3982.01,8901.69 4672.01,8901.69 9480.59,8903.27 10170.59,8903.27
I2C0.SCL: P2.19 R5.1 U101.48 | length 1268.9
  Top Layer w5.91: U101.48@5009.92,2354.45 5009.92,2315.08 5032.56,2292.44 5314.06,2292.44 ; R5.1@5314.06,2265.87 5314.06,2292.44 ; P2.19@5944.17,2597.17 5944.17,2588.5 5986.3,2546.38 5986.3,2471.57 5964.65,2449.92 5915.43,2449.92 5757.95,2292.44 5314.06,2292.44
I2C0.SDA: P2.21 R6.1 U101.50 | length 1050.3
  Top Layer w5.91: U101.50@5049.29,2354.45 5049.29,2312.13 5057.17,2304.25 5314.06,2304.25 ; R6.1@5315.04,2333.78 5315.04,2305.24 5314.06,2304.25 ; P2.21@5944.17,2497.17 5751.26,2304.25 5314.06,2304.25
I2C1.SCL: P2.11 R3.1 U101.96 | length 1186.1
  Top Layer w5.91: U101.96@5154.61,3266.85 v1(5340.63,3266.85) 5374.09,3300.32 5374.09,3388.9 R3.1@5479.41,3494.21
  Bottom Layer w5.91: v1(5340.63,3266.85) 5383.94,3266.85 5653.62,2997.17 P2.11@5944.17,2997.17
I2C1.SDA: P2.13 R4.1 U101.94 | length 1211.2
  Top Layer w5.91: U101.94@5154.61,3227.48 v1(5340.63,3227.48) 5385.91,3272.76 5385.91,3361.34 R4.1@5479.41,3454.84
  Bottom Layer w5.91: v1(5340.63,3227.48) 5383.94,3227.48 5714.25,2897.17 P2.13@5944.17,2897.17
I2C2.SCL: P2.3 R1.1 U101.100 | length 1095.8
  Top Layer w5.91: U101.100@5154.61,3345.59 5154.67,3345.66 5340.56,3345.66 v1(5340.63,3345.59) 5340.63,3434.17 R1.1@5479.41,3572.95
  Bottom Layer w5.91: v1(5340.63,3345.59) 5892.6,3345.59 P2.3@5944.17,3397.17
I2C2.SDA: P2.5 R2.1 U101.98 | length 1078.2
  Top Layer w5.91: U101.98@5154.61,3306.22 v1(5340.63,3306.22) 5362.28,3327.87 5362.28,3411.27 5479.41,3528.39 R2.1@5479.41,3533.58
  Bottom Layer w5.91: v1(5340.63,3306.22) 5935.12,3306.22 P2.5@5944.17,3297.17
JTAG.RTCK: P4.7 R103.1 U101.206 | length 4143.2
  Top Layer w5.91: v1@2323.7,4122.36 P4.7@2420.08,4122.36 2443.44,4099 2635.46,4099 2659.55,4074.92 R103.1@2730.39,4074.92 ; v1@3878.03,2202.17 3878.03,2449.92 3887.87,2459.76 U101.206@4018.78,2459.76
  Bottom Layer w5.91: v1(2319.17,4122.17) 2476.46,3964.88 2476.46,3757.01 2517.8,3715.67 2517.8,2817.15 2442.99,2742.35 2442.99,2444.42 2682.96,2204.45 v1@3876.89,2204.45
  other v1: 3879.17,2202.17
JTAG.T\R\S\T\: R51.1 U101.8 | length 3480.4
  Top Layer w5.91: v6(2665.43,4034.57) 2666.42,4035.55 R51.1@2730.39,4035.55 ; v1(3937.09,2312.13) 3956.77,2312.13 4084.72,2184.17 4183.15,2184.17 4222.52,2223.54 U101.8@4222.52,2354.45
  Bottom Layer w5.91: v6@2665.83,4034.57 2665.83,3550.51 2689.06,3527.28 2689.06,3452.9 2664.81,3428.66 2630.59,3428.66 2606.38,3404.45 2606.38,2656.1 2966.88,2295.59 3920.75,2295.59 3920.75,2295.79 v1(3937.09,2312.13)
JTAG.TCK: D13.1 P4.4 R104.1 U101.10 | length 4015.5
  Top Layer w5.91: P4.4@2580.08,4222.36 2687.64,4222.36 v1@2690.04,4219.96 ; D13.1@2714.65,4324.92 2714.65,4309.89 2690.04,4285.28 v1@2690.04,4219.96 ; R104.1@2730.39,4114.29 2690.04,4154.65 v1@2690.04,4219.96 ; U101.10@4261.89,2354.45 4261.89,2313.11 4321.93,2253.07 v1(4330.79,2253.07)
  Bottom Layer w5.91: v1(2689.06,4223.54) 2689.06,4111.34 2673.88,4096.17 2657.62,4096.17 2588.66,4027.21 2588.66,2648.76 2959.54,2277.87 4033.38,2277.87 4058.18,2253.07 v1(4330.79,2253.07)
JTAG.TDI: P4.8 U101.4 | length 3714.7
  Top Layer w5.91: P4.8@2580.88,4123.17 v1(2667.17,4123.17) ; v1@4143.78,2223.54 U101.4@4143.78,2354.45
  Bottom Layer w5.91: v1(2667.17,4123.17) 2666.17,4122.17 2634.4,4122.17 2570.94,4058.71 2570.94,2795.14 2496.14,2720.33 2496.14,2466.43 2702.42,2260.16 4030.21,2260.16 4049.11,2241.26 4120.08,2241.26 v1(4144.17,2217.17)
JTAG.TDO: P4.6 U101.2 | length 3754.9
  Top Layer w5.91: P4.6@2580.28,4172.17 v1(2667.17,4172.17) ; v1@4104.41,2222.4 U101.2@4104.41,2354.45
  Bottom Layer w5.91: v1(2667.17,4172.17) 2635.19,4172.17 2553.23,4090.2 2553.23,2802.48 2478.43,2727.67 2478.43,2459.09 2695.08,2242.44 4031.23,2242.44 4056.5,2217.17 v1(4104.17,2217.17)
JTAG.TMS: D2.1 P4.2 U101.6 | length 4148.1
  Top Layer w5.91: P4.2@2580.08,4272.36 v1(2667.4,4272.36) 2667.4,4332.8 2686.1,4351.5 2748.11,4351.5 D2.1@2774.68,4324.92 ; v1@4183.15,2223.54 U101.6@4183.15,2354.45
  Bottom Layer w5.91: v1(2667.4,4272.36) 2667.4,4254.38 2535.51,4122.49 2535.51,2809.81 2460.71,2735.01 2460.71,2451.76 2687.74,2224.72 4031.61,2224.72 4059.17,2197.17 4164.17,2197.17 v1(4184.17,2217.17)
LED0: D10.1 U101.65 | length 487.3
  Top Layer w5.91: U101.65@5154.61,2656.61 5334.72,2656.61 5430.69,2752.58 5430.69,2811.63 5482.36,2863.31 D10.1@5521.73,2863.31
LED1: D11.1 U101.64 | length 453.7
  Top Layer w5.91: U101.64@5154.61,2636.93 5344.57,2636.93 5452.83,2745.2 5452.83,2774.72 5482.36,2804.25 D11.1@5521.73,2804.25
LED2: D3.1 U101.59 | length 522.7
  Top Layer w5.91: U101.59@5154.61,2538.5 5155.59,2537.52 5392.8,2537.52 5403.62,2548.35 5403.62,2666.46 5482.36,2745.2 D3.1@5521.73,2745.2
LED3: D4.1 U101.58 | length 494.1
  Top Layer w5.91: U101.58@5154.61,2518.82 5413.46,2518.82 5423.31,2528.66 5423.31,2627.09 5482.36,2686.14 D4.1@5521.73,2686.14
LED4: D5.1 U101.57 | length 460.5
  Top Layer w5.91: U101.57@5154.61,2499.13 5433.15,2499.13 5442.99,2508.98 5442.99,2577.87 5492.2,2627.09 D5.1@5521.73,2627.09
LED5: D6.1 U101.56 | length 438.4
  Top Layer w5.91: U101.56@5154.61,2479.45 5442.99,2479.45 5462.68,2499.13 5462.68,2558.19 5472.52,2568.03 D6.1@5521.73,2568.03
LED6: D7.1 U101.55 | length 387.5
  Top Layer w5.91: U101.55@5154.61,2459.76 5452.83,2459.76 5502.05,2508.98 D7.1@5521.73,2508.98
LED7: D8.1 U101.54 | length 371.2
  Top Layer w5.91: U101.54@5154.61,2440.08 5472.52,2440.08 5482.36,2449.92 D8.1@5521.73,2449.92
NetC2.A_2: C2.A.2 U2.A.1 | length 105.4
  Top Layer w6: U2.A.1@4228.68,7606.61 4273.07,7606.61 C2.A.2@4316.18,7649.73
NetC2.B_2: C2.B.2 U2.B.1 | length 105.4
  Top Layer w6: U2.B.1@5132.03,7605.12 5176.42,7605.12 C2.B.2@5219.53,7648.23
NetC2.C_2: C2.C.2 U2.C.1 | length 105.4
  Top Layer w6: U2.C.1@6957.27,7603.19 7001.65,7603.19 C2.C.2@7044.76,7646.3
NetC2.D_2: C2.D.2 U2.D.1 | length 105.4
  Top Layer w6: U2.D.1@8432.18,7658.19 8476.57,7658.19 C2.D.2@8519.68,7701.3
NetC2.E_2: C2.E.2 U2.E.1 | length 105.4
  Top Layer w6: U2.E.1@10307.27,7658.19 10351.65,7658.19 C2.E.2@10394.76,7701.3
NetC3.A_1: C3.A.1 U2.A.6 | length 355.2
  Top Layer w6: C3.A.1@3841.18,7549.53 3903.78,7549.53 3936.18,7517.13 3989.55,7517.13 3996.89,7524.47 4093.53,7524.47 4103.68,7534.63 U2.A.6@4103.68,7606.61
NetC3.B_1: C3.B.1 U2.B.6 | length 355.2
  Top Layer w6: C3.B.1@4744.53,7548.03 4807.13,7548.03 4839.53,7515.63 4989.53,7515.63 5007.03,7533.13 U2.B.6@5007.03,7605.12
NetC3.C_1: C3.C.1 U2.C.6 | length 340.1
  Top Layer w6: C3.C.1@6569.76,7546.1 6632.36,7546.1 6664.77,7513.7 6789.02,7513.7 6832.27,7556.95 U2.C.6@6832.27,7603.19
NetC3.D_1: C3.D.1 U2.D.6 | length 355.2
  Top Layer w6: C3.D.1@8044.68,7601.1 8107.28,7601.1 8139.69,7568.7 8289.69,7568.7 8307.19,7586.2 U2.D.6@8307.18,7658.19
NetC3.E_1: C3.E.1 U2.E.6 | length 350.4
  Top Layer w6: C3.E.1@9919.76,7601.1 9982.36,7601.1 10009,7574.47 10133.55,7574.47 10143.55,7584.47 10180.54,7584.47 10182.27,7586.2 U2.E.6@10182.27,7658.19
NetC4.A_2: C4.A.2 U2.A.19 | length 208.6
  Top Layer w10: U2.A.19@4103.68,7417.64 4103.68,7262.03 C4.A.2@4141.18,7224.53
NetC4.B_2: C4.B.2 U2.B.19 | length 208.6
  Top Layer w10: U2.B.19@5007.03,7416.14 5007.03,7260.53 C4.B.2@5044.53,7223.03
NetC4.C_2: C4.C.2 U2.C.19 | length 208.6
  Top Layer w10: U2.C.19@6832.27,7414.21 6832.27,7258.6 C4.C.2@6869.76,7221.1
NetC4.D_2: C4.D.2 U2.D.19 | length 208.6
  Top Layer w10: U2.D.19@8307.18,7469.21 8307.19,7313.6 C4.D.2@8344.68,7276.1
NetC4.E_2: C4.E.2 U2.E.19 | length 208.6
  Top Layer w10: U2.E.19@10182.27,7469.21 10182.27,7313.6 C4.E.2@10219.76,7276.1
NetC6.A_2: C6.A.2 U2.A.18 | length 208.6
  Top Layer w10: C6.A.2@4041.18,7224.53 4078.68,7262.03 U2.A.18@4078.68,7417.64
NetC6.B_2: C6.B.2 U2.B.18 | length 208.6
  Top Layer w10: C6.B.2@4944.53,7223.03 4982.03,7260.53 U2.B.18@4982.03,7416.14
NetC6.C_2: C6.C.2 U2.C.18 | length 208.6
  Top Layer w10: C6.C.2@6769.76,7221.1 6807.26,7258.6 U2.C.18@6807.27,7414.21
NetC6.D_2: C6.D.2 U2.D.18 | length 208.6
  Top Layer w10: C6.D.2@8244.68,7276.1 8282.18,7313.6 U2.D.18@8282.18,7469.21
NetC6.E_2: C6.E.2 U2.E.18 | length 208.6
  Top Layer w10: C6.E.2@10119.76,7276.1 10157.26,7313.6 U2.E.18@10157.27,7469.21
NetC10.A_1: C10.A.1 U1.A.5 | length 177.9
  Top Layer w10: U1.A.5@4721.18,8474.53 4721.18,8387.13 4758.58,8349.73 C10.A.1@4758.58,8312.13
NetC10.B_1: C10.B.1 U1.B.5 | length 177.9
  Top Layer w10: U1.B.5@6094.53,8473.03 6094.53,8385.63 6131.93,8348.23 C10.B.1@6131.93,8310.63
NetC10.C_1: C10.C.1 U1.C.5 | length 177.9
  Top Layer w10: U1.C.5@7469.76,8471.1 7469.77,8383.7 7507.17,8346.3 C10.C.1@7507.17,8308.7
NetC10.D_1: C10.D.1 U1.D.5 | length 177.9
  Top Layer w10: U1.D.5@8846.14,8474.17 8846.14,8386.77 8883.54,8349.37 C10.D.1@8883.54,8311.77
NetC10.E_1: C10.E.1 U1.E.5 | length 177.9
  Top Layer w10: U1.E.5@10219.76,8476.1 10219.77,8388.7 10257.17,8351.3 C10.E.1@10257.17,8313.7
NetC12.A_1: C12.A.1 U2.A.12 | length 105.4
  Top Layer w6: C12.A.1@3866.18,7649.72 3909.29,7606.61 U2.A.12@3953.68,7606.61
NetC12.B_1: C12.B.1 U2.B.12 | length 105.4
  Top Layer w6: C12.B.1@4769.53,7648.23 4812.64,7605.12 U2.B.12@4857.03,7605.12
NetC12.C_1: C12.C.1 U2.C.12 | length 105.4
  Top Layer w6: C12.C.1@6594.76,7646.3 6637.88,7603.19 U2.C.12@6682.27,7603.19
NetC12.D_1: C12.D.1 U2.D.12 | length 105.4
  Top Layer w6: C12.D.1@8069.68,7701.3 8112.8,7658.19 U2.D.12@8157.18,7658.19
NetC12.E_1: C12.E.1 U2.E.12 | length 105.4
  Top Layer w6: C12.E.1@9944.76,7701.3 9987.88,7658.19 U2.E.12@10032.27,7658.19
NetC18.A_1: C18.A.1 U3.A.5 | length 177.9
  Top Layer w10: U3.A.5@4031.18,8474.53 4031.18,8387.13 4068.58,8349.72 C18.A.1@4068.58,8312.13
NetC18.B_1: C18.B.1 U3.B.5 | length 177.9
  Top Layer w10: U3.B.5@5404.53,8473.03 5404.53,8385.63 5441.93,8348.23 C18.B.1@5441.93,8310.63
NetC18.C_1: C18.C.1 U3.C.5 | length 177.9
  Top Layer w10: U3.C.5@6779.76,8471.1 6779.77,8383.7 6817.17,8346.3 C18.C.1@6817.17,8308.7
NetC18.D_1: C18.D.1 U3.D.5 | length 177.9
  Top Layer w10: U3.D.5@8156.14,8474.17 8156.14,8386.77 8193.54,8349.37 C18.D.1@8193.54,8311.77
NetC18.E_1: C18.E.1 U3.E.5 | length 177.9
  Top Layer w10: U3.E.5@9529.76,8476.1 9529.77,8388.7 9567.17,8351.3 C18.E.1@9567.17,8313.7
NetC25_2: C25.2 C26.2 P3.4 U13.1 | length 836.2
  Top Layer w19.68: P3.4@2647.72,3187.32 2500.08,3334.96 2500.08,3640.87 2547.32,3688.11 U13.1@2614.25,3688.11 2679.21,3688.11 ; C26.2@2728.43,3680.24 2687.09,3680.24 2679.21,3688.11 ; C25.2@2728.43,3719.61 2696.93,3719.61 2679.21,3701.89 2679.21,3688.11
NetC114_2: C114.2 C115.2 FB101.2 U101.20 | length 188.1
  Top Layer w5.91: C115.2@4419.37,2270.79 4419.37,2292.44 4429.21,2302.28 4458.74,2302.28 ; U101.20@4458.74,2354.45 4458.74,2302.28 ; FB101.2@4498.11,2270.79 C114.2@4458.74,2270.79 4458.74,2302.28
NetC120_1: C120.1 U101.44 X101.1 | length 177.5
  Top Layer w5.91: C120.1@4872.13,2231.42 4872.13,2253.07 4876.06,2257.01 4927.24,2257.01 4931.18,2260.95 U101.44@4931.18,2354.45
NetC121_2: C121.2 U101.46 X101.2 | length 291.9
  Top Layer w5.91: U101.46@4970.55,2354.45 4970.55,2203.86 4994.17,2180.24 4994.17,2170.39 X101.2@5004.02,2170.39 5065.04,2170.39 5068.98,2174.33 C121.2@5068.98,2195.98
NetC122_1: C122.1 U101.34 X102.2 | length 322.3
  Top Layer w5.91: C122.1@4696.93,2154.65 4675.28,2154.65 4665.43,2164.49 4665.43,2223.54 ; X102.2@4704.8,2223.54 4665.43,2223.54 ; U101.34@4734.33,2354.45 4734.33,2302.28 4724.49,2292.44 4675.28,2292.44 4665.43,2282.6 4665.43,2223.54
NetC123_2: C123.2 U101.36 X102.1 | length 308.4
  Top Layer w5.91: U101.36@4773.7,2354.45 4773.7,2297.36 4801.26,2269.8 4826.85,2269.8 4842.6,2254.06 4842.6,2223.54 ; X102.1@4803.23,2223.54 4842.6,2223.54 ; C123.2@4811.1,2154.65 4832.76,2154.65 4842.6,2164.49 4842.6,2223.54
NetC205_2: C205.2 R201.2 U202.1 | length 243.3
  Top Layer w5.91: U202.1@3378.03,3884.96 3419.37,3884.96 3446.93,3857.4 3513.86,3857.4 3523.7,3847.56 ; C205.2@3545.35,3808.19 3524.66,3808.19 3523.7,3809.14 3523.7,3847.56 ; R201.2@3545.35,3847.56 3523.7,3847.56
NetC206_2: C206.2 R202.2 U204.1 | length 238.1
  Top Layer w5.91: U204.1@3378.03,3727.48 3417.4,3727.48 3444.96,3699.92 3513.86,3699.92 ; C206.2@3545.35,3670.39 3523.7,3670.39 3513.86,3680.24 3513.86,3699.92 ; R202.2@3545.35,3709.76 3523.7,3709.76 3513.86,3699.92
NetC213.A_1: C213.A.1 R212.A.2 U211.A.5 | length 315.4
  Top Layer w5.91: U211.A.5@4726.46,4404.06 v1(4797.32,4404.06) ; R212.A.2@4899.69,4438.11 v1(4931.18,4438.11) 4931.18,4467.64 4921.34,4477.48 C213.A.1@4899.69,4477.48
  Bottom Layer w5.91: v1(4797.32,4404.06) 4897.13,4404.06 v1(4931.18,4438.11)
NetC213.A_2: C213.A.2 R211.A.1 R212.A.1 U211.A.6 | length 287.7
  Top Layer w5.91: U211.A.6@4726.46,4454.06 4822.91,4454.06 ; R211.A.1@4864.25,4398.74 4832.76,4398.74 4822.91,4408.58 4822.91,4438.11 ; R212.A.1@4864.25,4438.11 4822.91,4438.11 ; C213.A.2@4864.25,4477.48 4832.76,4477.48 4822.91,4467.64 4822.91,4454.06 ; 4822.91,4438.11 4822.91,4454.06
NetC213.B_1: C213.B.1 R212.B.2 U211.B.5 | length 315.4
  Top Layer w5.91: U211.B.5@4726.46,3892.24 v1(4797.32,3892.24) ; R212.B.2@4899.69,3926.3 v1(4931.18,3926.3) 4931.18,3955.83 4921.34,3965.67 C213.B.1@4899.69,3965.67
  Bottom Layer w5.91: v1(4797.32,3892.24) 4897.13,3892.24 v1(4931.18,3926.3)
NetC213.B_2: C213.B.2 R211.B.1 R212.B.1 U211.B.6 | length 287.7
  Top Layer w5.91: U211.B.6@4726.46,3942.24 4822.91,3942.24 ; R211.B.1@4864.25,3886.93 4832.76,3886.93 4822.91,3896.77 4822.91,3926.3 ; R212.B.1@4864.25,3926.3 4822.91,3926.3 ; C213.B.2@4864.25,3965.67 4832.76,3965.67 4822.91,3955.83 4822.91,3942.24 ; 4822.91,3926.3 4822.91,3942.24
NetC214.A_2: C214.A.2 U211.A.9 | length 517.7
  Top Layer w5.91: U211.A.9@4368.19,4554.06 4447.32,4554.06 4472.32,4529.06 4797.32,4529.06 4824.49,4556.22 C214.A.2@4864.25,4556.22
NetC214.B_2: C214.B.2 U211.B.9 | length 517.7
  Top Layer w5.91: U211.B.9@4368.19,4042.24 4447.32,4042.24 4472.32,4017.24 4797.32,4017.24 4824.49,4044.41 C214.B.2@4864.25,4044.41
NetC221.A_1: C221.A.1 R221.A.1 | length 90.8
  Top Layer w5.91: R221.A.1@4126.06,4418.43 4147.72,4418.43 4157.56,4428.27 4157.56,4447.95 4147.72,4457.8 C221.A.1@4126.06,4457.8
NetC221.B_1: C221.B.1 R221.B.1 | length 90.8
  Top Layer w5.91: R221.B.1@4126.06,3985.35 4147.72,3985.35 4157.56,3995.2 4157.56,4014.88 4147.72,4024.72 C221.B.1@4126.06,4024.72
NetC223.A_2: C223.A.2 R222.A.1 U221.A.19 | length 688.2
  Top Layer w5.91: U221.A.19@3728.43,4368.23 3810.12,4368.23 3941.02,4237.32 4163.46,4237.32 4177.24,4251.1 4177.24,4260.94 ; R222.A.1@4126.06,4260.94 4177.24,4260.94 ; C223.A.2@4126.06,4339.69 4157.56,4339.69 4177.24,4320 4177.24,4260.94
NetC223.B_2: C223.B.2 R222.B.1 U221.B.19 | length 688.2
  Top Layer w5.91: U221.B.19@3728.43,3935.16 3810.12,3935.16 3941.02,3804.25 4163.46,3804.25 4177.24,3818.03 4177.24,3827.87 ; R222.B.1@4126.06,3827.87 4177.24,3827.87 ; C223.B.2@4126.06,3906.61 4157.56,3906.61 4177.24,3886.93 4177.24,3827.87
NetD1_2: D1.2 R7.1 | length 90.6
  Top Layer w5.91: D1.2@2834.72,3077.87 R7.1@2834.72,3168.43
NetD2_2: D2.2 R8.1 | length 91.2
  Top Layer w5.91: R8.1@2730.39,4193.03 2730.39,4221.57 D2.2@2774.68,4265.87
NetD3_2: D3.2 R54.1 | length 139.8
  Top Layer w5.91: D3.2@5580.79,2745.2 R54.1@5720.55,2745.2
NetD4_2: D4.2 R55.1 | length 139.8
  Top Layer w5.91: D4.2@5580.79,2686.14 R55.1@5720.55,2686.14
NetD5_2: D5.2 R56.1 | length 139.8
  Top Layer w5.91: D5.2@5580.79,2627.09 R56.1@5720.55,2627.09
NetD6_2: D6.2 R57.1 | length 139.8
  Top Layer w5.91: D6.2@5580.79,2568.03 R57.1@5720.55,2568.03
NetD7_2: D7.2 R58.1 | length 139.8
  Top Layer w5.91: D7.2@5580.79,2508.98 R58.1@5720.55,2508.98
NetD8_2: D8.2 R59.1 | length 139.8
  Top Layer w5.91: D8.2@5580.79,2449.92 R59.1@5720.55,2449.92
NetD9_2: D9.2 R60.1 | length 149.6
  Top Layer w5.91: R60.1@5349.49,2209.76 D9.2@5499.09,2209.76
NetD10_2: D10.2 R52.1 | length 139.8
  Top Layer w5.91: D10.2@5580.79,2863.31 R52.1@5720.55,2863.31
NetD11_2: D11.2 R53.1 | length 139.8
  Top Layer w5.91: D11.2@5580.79,2804.25 R53.1@5720.55,2804.25
NetD12_2: D12.2 R9.1 | length 90.6
  Top Layer w5.91: D12.2@2834.72,3384.96 R9.1@2834.72,3475.51
NetD13_2: D13.2 R10.1 | length 121.2
  Top Layer w5.91: D13.2@2714.65,4265.87 2711.69,4262.91 2711.69,4177.55 2730.39,4158.85 R10.1@2730.39,4153.66
NetD100_1: D100.1 R33.2 | length 101.7
  Top Layer w6: D100.1@6900.79,6853.74 6950.79,6903.74 R33.2@6981.73,6903.74
NetD101_1: D101.1 R34.2 | length 85.1
  Top Layer w6: D101.1@6900.79,6953.74 6910.79,6963.74 R34.2@6981.73,6963.74
NetJ1_2: J1.2 U8.15 | length 418.8
  Top Layer w6: U8.15@5656.46,6723.31 5700,6723.31 5738.44,6684.87 5895.85,6684.87 5920.63,6709.65 5920.63,6779.65 5940.98,6799.99 J1.2@5970.63,6799.99
NetJ2_2: J2.2 U8.16 | length 319.4
  Top Layer w6: U8.16@5656.46,6748.9 5691.38,6748.9 5743.41,6696.87 5807.85,6696.87 5820.63,6709.65 5820.63,6779.65 5840.98,6799.99 J2.2@5870.63,6799.99
NetJ3_2: J3.2 U8.17 | length 124.7
  Top Layer w6: U8.17@5656.46,6774.49 5705.47,6774.49 5730.98,6799.99 J3.2@5770.63,6799.99
NetJ4_2: J4.2 U9.15 | length 418.8
  Top Layer w6: U9.15@7555.28,6772.36 7598.82,6772.36 7637.26,6733.92 7794.67,6733.92 7819.45,6758.7 7819.45,6828.7 7839.8,6849.05 J4.2@7869.45,6849.05
NetJ5_2: J5.2 U9.16 | length 319.4
  Top Layer w6: U9.16@7555.28,6797.95 7590.2,6797.95 7642.23,6745.92 7706.67,6745.92 7719.45,6758.7 7719.45,6828.7 7739.8,6849.05 J5.2@7769.45,6849.05
NetJ6_2: J6.2 U9.17 | length 124.7
  Top Layer w6: U9.17@7555.28,6823.54 7604.29,6823.54 7629.8,6849.05 J6.2@7669.45,6849.05
NetJ7_2: J7.2 U12.15 | length 418.8
  Top Layer w6: U12.15@9047.65,6793.78 9091.19,6793.78 9129.63,6755.34 9287.04,6755.34 9311.82,6780.12 9311.82,6850.12 9332.17,6870.47 J7.2@9361.82,6870.47
NetJ8_2: J8.2 U12.16 | length 319.4
  Top Layer w6: U12.16@9047.65,6819.37 9082.57,6819.37 9134.6,6767.34 9199.04,6767.34 9211.82,6780.12 9211.82,6850.12 9232.17,6870.47 J8.2@9261.82,6870.47
NetJ9_2: J9.2 U12.17 | length 124.7
  Top Layer w6: U12.17@9047.65,6844.96 9096.66,6844.96 9122.17,6870.47 J9.2@9161.82,6870.47
NetQ1.A_D1: Q1.A.D1 Q1.A.D2 | length 226.4
  Top Layer w10: Q1.A.D2@4504.57,7398.94 Q1.A.D1@4504.57,7625.31
NetQ1.A_G1: Q1.A.G1 U2.A.2 | length 367.7
  Top Layer w8: U2.A.2@4203.68,7606.61 4203.68,7549.63 4216.18,7537.13 4416.18,7537.13 4427.79,7548.74 Q1.A.G1@4427.8,7625.31
NetQ1.A_G2: Q1.A.G2 U2.A.24 | length 342.7
  Top Layer w8: U2.A.24@4228.68,7417.64 4228.68,7474.63 4241.18,7487.13 4416.18,7487.13 4427.79,7475.51 Q1.A.G2@4427.8,7398.94
NetQ1.A_S1: Q1.A.S1 R1.A.2 U2.A.3 | length 547.6
  Top Layer w6: U2.A.3@4178.68,7606.61 4178.68,7657.7 4208.11,7687.13 4466.18,7687.13
  Top Layer w12: Q1.A.S1@4453.39,7625.31 4453.39,7674.33 4466.18,7687.13 4478.98,7674.33 Q1.A.S1@4478.98,7625.31
  Top Layer w40: 4466.18,7687.13 R1.A.2@4466.18,7749.73
NetQ1.B_D1: Q1.B.D1 Q1.B.D2 | length 226.4
  Top Layer w10: Q1.B.D2@5407.91,7397.44 Q1.B.D1@5407.91,7623.82
NetQ1.B_G1: Q1.B.G1 U2.B.2 | length 367.7
  Top Layer w8: U2.B.2@5107.03,7605.12 5107.03,7548.13 5119.53,7535.63 5319.53,7535.63 5331.14,7547.24 Q1.B.G1@5331.14,7623.82
NetQ1.B_G2: Q1.B.G2 U2.B.24 | length 342.7
  Top Layer w8: U2.B.24@5132.03,7416.14 5132.03,7473.13 5144.53,7485.63 5319.53,7485.63 5331.14,7474.02 Q1.B.G2@5331.14,7397.44
NetQ1.B_S1: Q1.B.S1 R1.B.2 U2.B.3 | length 542.9
  Top Layer w6: U2.B.3@5082.03,7605.12 5082.03,7648.13 5119.53,7685.63 5369.53,7685.63
  Top Layer w10: Q1.B.S1@5356.73,7623.82 5356.73,7672.84 5369.53,7685.63 5382.32,7672.84 Q1.B.S1@5382.32,7623.82
  Top Layer w40: 5369.53,7685.63 R1.B.2@5369.53,7748.23
NetQ1.C_D1: Q1.C.D1 Q1.C.D2 | length 226.4
  Top Layer w10: Q1.C.D2@7233.15,7395.51 Q1.C.D1@7233.15,7621.89
NetQ1.C_G1: Q1.C.G1 U2.C.2 | length 367.7
  Top Layer w8: U2.C.2@6932.27,7603.19 6932.27,7546.2 6944.77,7533.7 7144.77,7533.7 7156.38,7545.32 Q1.C.G1@7156.38,7621.89
NetQ1.C_G2: Q1.C.G2 U2.C.24 | length 342.7
  Top Layer w8: U2.C.24@6957.27,7414.21 6957.27,7471.2 6969.77,7483.7 7144.77,7483.7 7156.38,7472.09 Q1.C.G2@7156.38,7395.51
NetQ1.C_S1: Q1.C.S1 R1.C.2 U2.C.3 | length 542.9
  Top Layer w6: U2.C.3@6907.27,7603.19 6907.26,7646.2 6944.76,7683.7 7194.76,7683.7
  Top Layer w10: Q1.C.S1@7181.97,7621.89 7181.97,7670.91 7194.76,7683.7 7207.56,7670.91 Q1.C.S1@7207.56,7621.89
  Top Layer w40: 7194.76,7683.7 R1.C.2@7194.76,7746.3
NetQ1.D_D1: Q1.D.D1 Q1.D.D2 | length 226.4
  Top Layer w10: Q1.D.D2@8708.07,7450.51 Q1.D.D1@8708.07,7676.89